# Altium PCB 7953_VHDC.PcbDoc
Units mil, origin at the board's own origin, x right, y up, seen from the top; angles counter-clockwise.
Board outline 2834.65 x 1417.32 mil, 2 copper layers (Top Layer, Bottom Layer); 2 components, 30 nets, 126 pads, 0 vias.
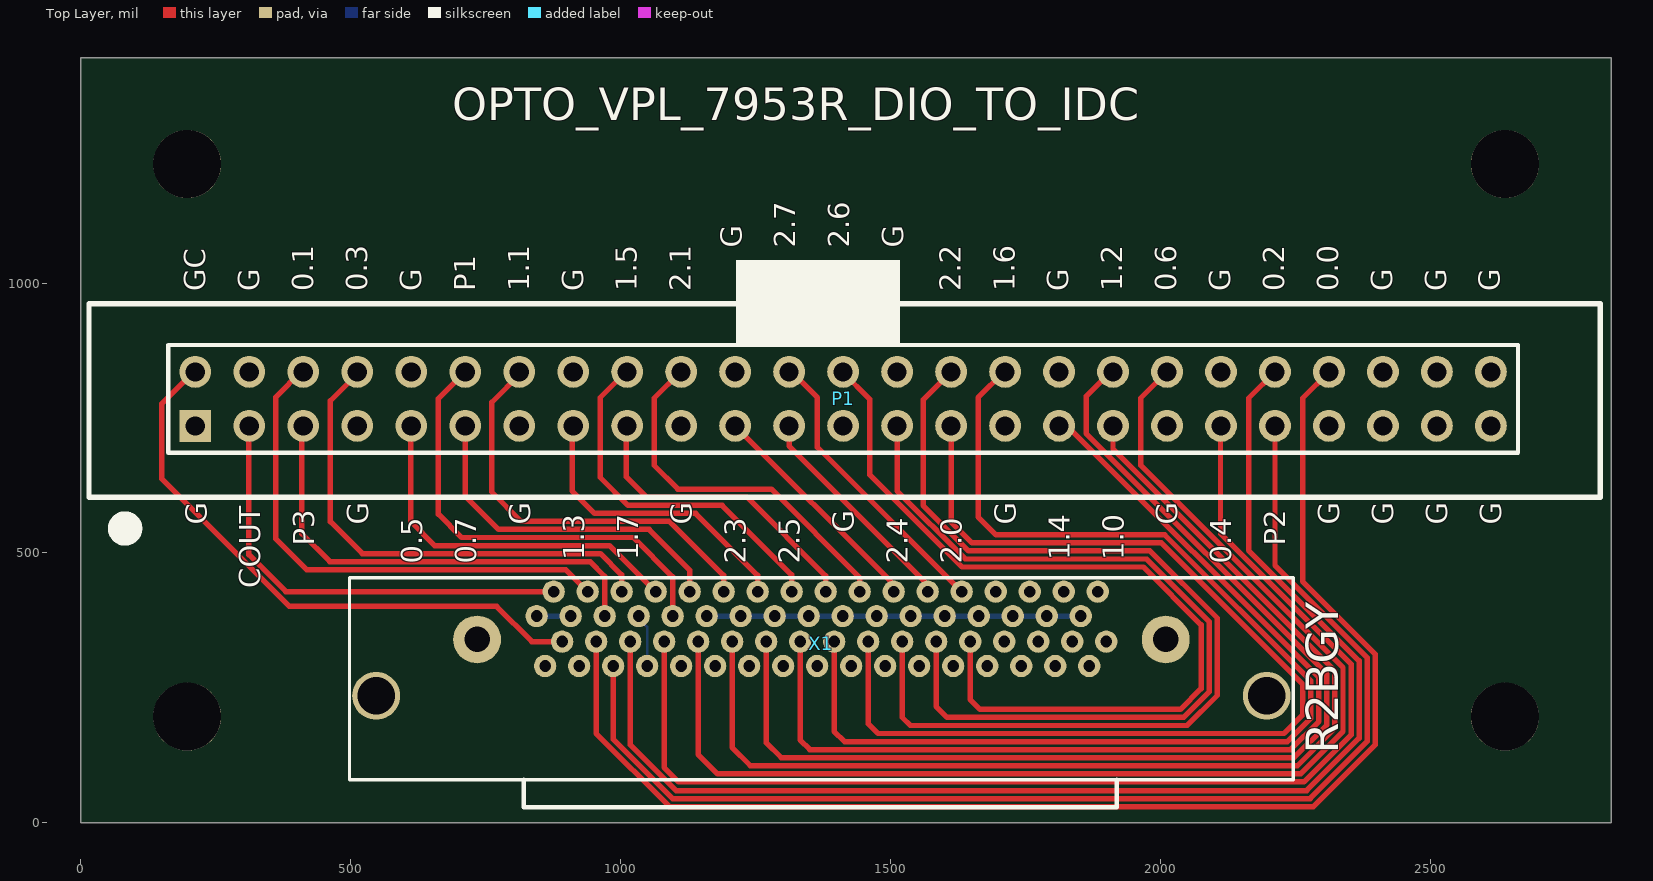
[diagram p0: Top Layer view]
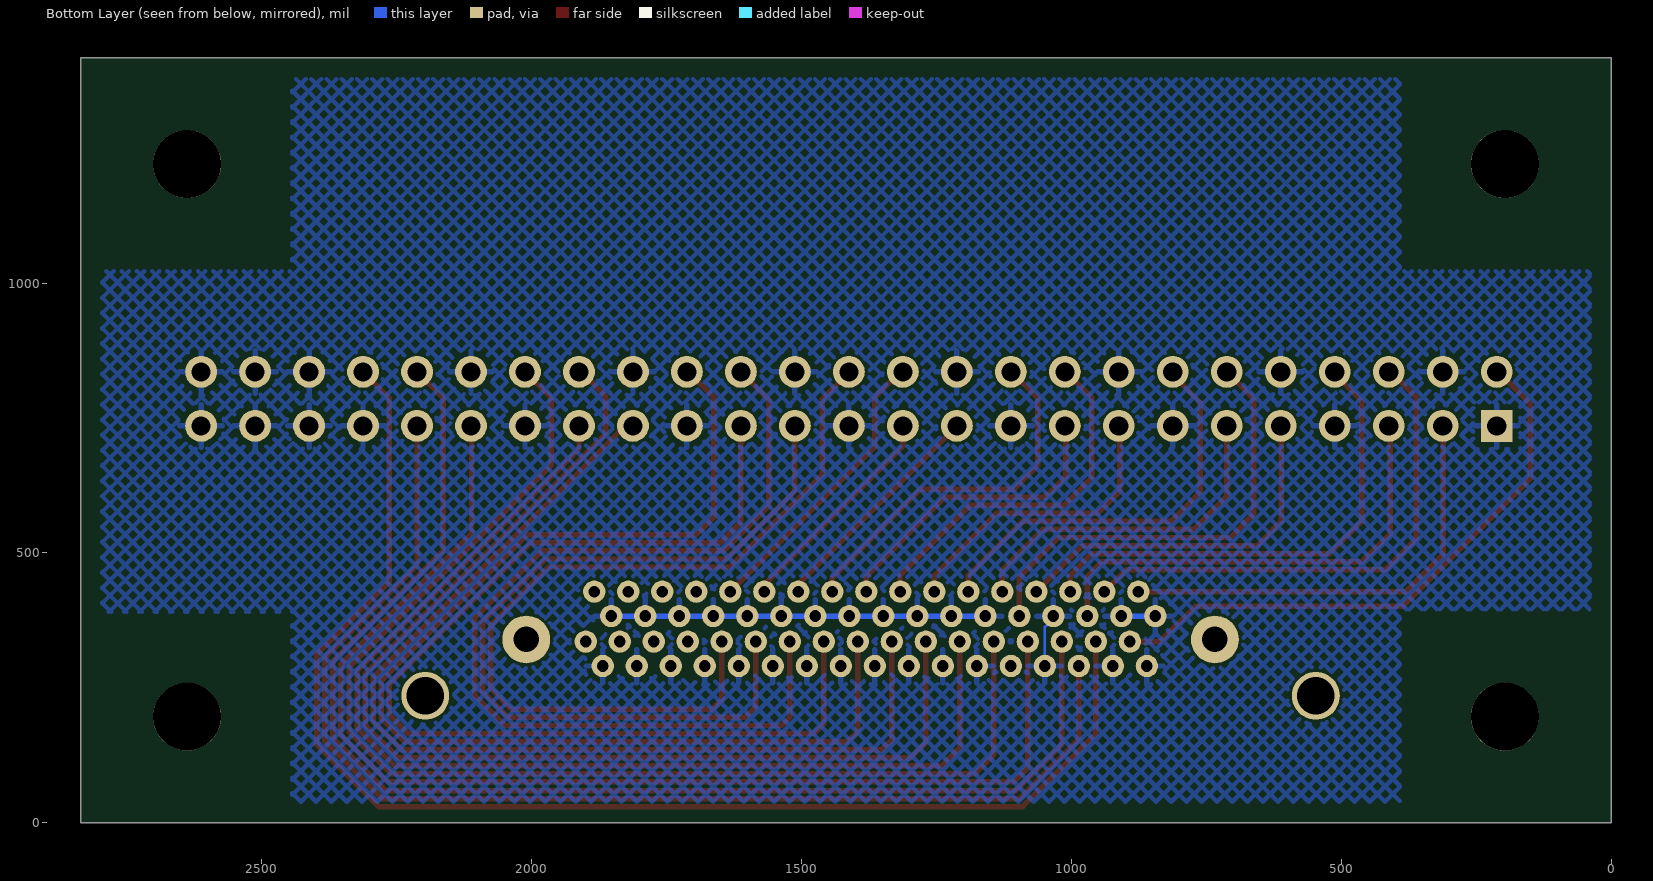
[diagram p1: Bottom Layer view, seen from below]

## Layer stack, top to bottom
Top Solder: solder mask 0.4, Solder Resist, Dk 3.5
Top Layer: signal copper 1.4
Dielectric 1: dielectric 12.6, FR-4, Dk 4.8
Bottom Layer: signal copper 1.4
Bottom Solder: solder mask 0.4, Solder Resist, Dk 3.5

## Board outline
0,0 0,1417.32 2834.65,1417.32 2834.65,0

## Design rules (kind name [scope] priority, off if disabled: settings)
Clearance [All] p1: gap=4.92 ignorepadtopadclearanceinfootprint=FALSE
PolygonConnect [All] p1: connectstyle=Relief reliefconductorwidth=10 reliefentries=4 polygonreliefangle="90 Angle" airgapwidth=10
RoutingVias [All] p1: holewidth=28 width=50 viastyle="Through Hole" minholewidth=28 minwidth=50 maxholewidth=28 maxwidth=50
SolderMaskExpansion [All] p1: expansion=4 istentingtop=FALSE
Width [All] p1: maxlimit=10 minlimit=4.92 preferedwidth=10
30 further rules are at their usual default settings.

## Classes and differential pairs
component class 7953_VHDC: X1

## Components (designator, comment, footprint, x,y, rotation, side; value= is the part's Value field where it differs from the comment)
P1 "Header 25X2" HDR2X25 211.85,735.47 r0 top
X1 "FPGA_connector" FPGA 546.85,235.47 r0 top

## Footprints (in the part's own frame and the unit in brackets; to place one, negate y for a bottom-side part, rotate by r counter-clockwise, add the part's x,y. Pads: shape width x height; smd on the part's side, far side on the other; paste and mask are expansions set on the pad)
FPGA [mm] "FPGA Connector"
  round 1.05 hole 0.55: 1(33.95,4.9) 2(33.15,3.75) 3(32.35,4.9) 4(31.55,3.75) 5(30.75,4.9) 6(29.95,3.75) 7(29.15,4.9) 8(28.35,3.75) 9(27.55,4.9) 10(26.75,3.75) 11(25.95,4.9) 12(25.15,3.75) 13(24.35,4.9) 14(23.55,3.75) 15(22.75,4.9) 16(21.95,3.75) 17(21.15,4.9) 18(20.35,3.75) 19(19.55,4.9) 20(18.75,3.75) 21(17.95,4.9) 22(17.15,3.75) 23(16.35,4.9) 24(15.55,3.75) 25(14.75,4.9) 26(13.95,3.75) 27(13.15,4.9) 28(12.35,3.75) 29(11.55,4.9) 30(10.75,3.75) 31(9.95,4.9) 32(9.15,3.75) 33(8.35,4.9) 34(7.55,3.75) 35(34.35,2.55) 36(33.55,1.4) 37(32.75,2.55) 38(31.95,1.4) 39(31.15,2.55) 40(30.35,1.4) 41(29.55,2.55) 42(28.75,1.4) 43(27.95,2.55) 44(27.15,1.4) 45(26.35,2.55) 46(25.55,1.4) 47(24.75,2.55) 48(23.95,1.4) 49(23.15,2.55) 50(22.35,1.4) 51(21.55,2.55) 52(20.75,1.4) 53(19.95,2.55) 54(19.15,1.4) 55(18.35,2.55) 56(17.55,1.4) 57(16.75,2.55) 58(15.95,1.4) 59(15.15,2.55) 60(14.35,1.4) 61(13.55,2.55) 62(12.75,1.4) 63(11.95,2.55) 64(11.15,1.4) 65(10.35,2.55) 66(9.55,1.4) 67(8.75,2.55) 68(7.95,1.4)
  round 2.25 hole 1.2: 69(37.15,2.65) 71(4.75,2.65)
  round 2.25 hole 1.75: 70(41.9,0) 72(0,0)
  silkscreen extent -1.25,-5.25 43.15,5.55
HDR2X25 [mm] "Connector; Header; 25x2 Position"
  rect 1.5x1.5 hole 0.9: 1(0,0)
  round 1.5 hole 0.9: 2(0,2.54) 3(2.54,0) 4(2.54,2.54) 5(5.08,0) 6(5.08,2.54) 7(7.62,0) 8(7.62,2.54) 9(10.16,0) 10(10.16,2.54) 11(12.7,0) 12(12.7,2.54) 13(15.24,0) 14(15.24,2.54) 15(17.78,0) 16(17.78,2.54) 17(20.32,0) 18(20.32,2.54) 19(22.86,0) 20(22.86,2.54) 21(25.4,0) 22(25.4,2.54) 23(27.94,0) 24(27.94,2.54) 25(30.48,0) 26(30.48,2.54) 27(33.02,0) 28(33.02,2.54) 29(35.56,0) 30(35.56,2.54) 31(38.1,0) 32(38.1,2.54) 33(40.64,0) 34(40.64,2.54) 35(43.18,0) 36(43.18,2.54) 37(45.72,0) 38(45.72,2.54) 39(48.26,0) 40(48.26,2.54) 41(50.8,0) 42(50.8,2.54) 43(53.34,0) 44(53.34,2.54) 45(55.88,0) 46(55.88,2.54) 47(58.42,0) 48(58.42,2.54) 49(60.96,0) 50(60.96,2.54)
  silkscreen extent -1.27,-1.27 62.23,3.81

## Part data
P1: "Header, 25-Pin, Dual row", LatestRevisionDate=17-Jul-2002, LatestRevisionNote="Re-released for DXP Platform.", Publisher="Altium Limited"
X1: library part FPGA_Connector

## Free pads (board coordinates)
  round 125.98 hole 125.98 unplated: 0(196.85,196.85) 0(196.85,1220.47) 0(2637.8,196.85) 0(2637.8,1220.47)

## Nets (pads, with @x,y where several pads share a name; then routed paths per layer and width w, separated by ;. In a path a pad name is that pad's centre, name@x,y a point inside that pad or via, vN(x,y) a via of type N, cw(c..) or ccw(c..) an arc to the next point about the centre after c; other vN are vias at no path point)
CLKOUT: P1.3 X1.33 | length 831.4
  Top Layer w10: P1.3@311,735.47 311,497.1 379.72,428.39 X1.33
GCLK0: P1.2 X1.67 | length 1091.2
  Top Layer w10: P1.2@210.16,837.16 150,777 150,637 386,401 770,401 835.13,335.87 X1.67
GND: P1.1 P1.4 P1.7 P1.10 P1.13 P1.16 P1.19 P1.22 P1.25 P1.28 P1.31 P1.34 P1.37 P1.40 P1.43 P1.45 P1.46 P1.47 P1.48 P1.49 P1.50 X1.2 X1.4 X1.6 X1.8 X1.10 X1.12 X1.14 X1.16 X1.18 X1.20 X1.22 X1.24 X1.28 X1.32 X1.34 X1.36 X1.38 X1.40 X1.42 X1.44 X1.46 X1.48 X1.50 X1.52 X1.54 X1.56 X1.58 X1.62 X1.66 X1.68 | length 854.9
  Bottom Layer w5: X1.28 1033.07,378.91 1048.82,363.16 X1.62
  Bottom Layer w10: X1.34 X1.32 ; X1.24 X1.22 X1.20 X1.18 X1.16 X1.14 X1.12 X1.10 X1.8 X1.6 X1.4 X1.2
P0.0: P1.44 X1.65 | length 2483.9
  Top Layer w10: X1.65 954.33,165.67 1090,30 2283,30 2397.53,144.53 2397.53,312.63 2263,447.15 2263,786.62 P1.44
P0.1: P1.6 X1.31 | length 949.8
  Top Layer w10: P1.6@409.66,837.66 361,789 361,526 418,469 897.97,469 X1.31
P0.2: P1.42 X1.63 | length 2400.4
  Top Layer w10: X1.63 1017.32,144.88 1102.36,59.84 2270.64,59.84 2367.69,156.89 2367.69,300.26 2163,504.95 2163,786.62 P1.42
P0.3: P1.8 X1.29 | length 908.5
  Top Layer w10: P1.8@513.66,833.66 462,782 462,558 521.16,498.84 962.16,498.84 1001.57,459.43 X1.29
P0.4: P1.39 X1.61 | length 2225.1
  Top Layer w10: X1.61 1080.32,102.99 1107.31,76 2265.69,76 2352.76,163.07 2352.76,294.08 2111,535.85 P1.39@2111,735.47
P0.5: P1.9 X1.27 | length 684.7
  Top Layer w10: P1.9@611,735.47 611,558 655.24,513.76 979.19,513.76 X1.27
P0.6: P1.38 X1.59 | length 2302.1
  Top Layer w10: X1.59 1143.31,126.69 1179.08,90.92 2259.51,90.92 2337.84,169.25 2337.84,287.9 1963,662.75 1963,786.62 P1.38@2018.48,842.11
P0.7: P1.11 X1.25 | length 642.7
  Top Layer w10: P1.11@712,735.47 712,605 773.39,543.61 1052.39,543.61 1127.56,468.44 X1.25
P1.0: P1.35 X1.57 | length 2085.9
  Top Layer w10: X1.57 1206.3,139.7 1240.16,105.84 2253.33,105.84 2322.92,175.43 2322.92,281.72 1911.85,692.79 P1.35
P1.1: P1.14 X1.23 | length 765.5
  Top Layer w10: P1.14@814.66,832.66 761,779 761,613 815.47,558.53 1090.47,558.53 1190.55,458.45 X1.23
P1.2: P1.36 X1.55 | length 2123.2
  Top Layer w10: X1.55 1269.29,148.71 1297.24,120.76 2247.15,120.76 2308,181.61 2308,275.54 1862,721.54 1862,790 P1.36@1909.66,837.66
P1.3: P1.15 X1.21 | length 558.9
  Top Layer w10: P1.15@910,735.47 910,615 951.55,573.45 1138.55,573.45 1253.54,458.46 X1.21
P1.4: P1.33 X1.53 | length 1927.9
  Top Layer w10: X1.53 1332.28,153.72 1350.31,135.69 2240.97,135.69 2293.08,187.79 2293.08,269.36 1826.97,735.47 P1.33
P1.5: P1.18 X1.19 | length 677.2
  Top Layer w10: P1.18@1010.66,836.66 962,788 962,640 1013.63,588.37 1187.63,588.37 1316.54,459.46 X1.19
P1.6: P1.32 X1.51 | length 2175.9
  Top Layer w10: X1.51 1395.28,169.72 1414.39,150.61 2234.79,150.61 2278.16,193.97 2278.16,263.18 2007.65,533.69 1695.31,533.69 1662,567 1662,788 P1.32@1710.66,836.66
P1.7: P1.17 X1.17 | length 568.9
  Top Layer w10: P1.17@1010,735.47 1010,641.29 1048,603.29 1233.71,603.29 1379.53,457.47 X1.17
P2.0: P1.29 X1.49 | length 1989.6
  Top Layer w10: X1.49 1458.27,183.73 1476.47,165.53 2228.61,165.53 2263.24,200.15 2263.24,257 2001.47,518.76 1650.54,518.76 1612,557.31 P1.29@1612,735.47
P2.1: P1.20 X1.15 | length 687.1
  Top Layer w10: P1.20@1111.16,836.16 1062,787 1062,662 1105.79,618.21 1278.79,618.21 1442.52,454.48 X1.15
P2.2: P1.30 X1.47 | length 1796.4
  Top Layer w10: X1.47 1521.26,195.74 1536.55,180.45 2049,180.45 2104.92,236.37 2104.92,379.28 1980.36,503.84 1644.36,503.84 1560,588.2 1560,783.62 P1.30
P2.3: P1.21 X1.13 | length 428.7
  Top Layer w10: P1.21 1499.52,447.81 1499.52,434.38 X1.13
P2.4: P1.27 X1.45 | length 1583
  Top Layer w10: P1.27@1512,735.47 1512,615.1 1638.18,488.92 1974.18,488.92 2090,373.1 2090,242.55 2042.82,195.37 1604.63,195.37 1584.25,215.75 X1.45
P2.5: P1.23 X1.11 | length 413.4
  Top Layer w10: P1.23 1311.85,698.15 1562.51,447.49 1562.51,434.38 X1.11
P2.6: P1.26 X1.43 | length 1616.4
  Top Layer w10: P1.26@1411.19,834.81 1461,785 1461,645 1632,474 1968,474 2075.08,366.92 2075.08,248.73 2036.64,210.29 1665.71,210.29 1647.24,228.76 X1.43
P2.7: P1.24 X1.9 | length 540.9
  Top Layer w10: P1.24@1314.19,837.81 1364,788 1364,695.88 X1.9
PFI1: P1.12 X1.26 | length 839.2
  Top Layer w10: P1.12@711.66,835.66 662,786 662,572 705.31,528.69 1023.31,528.69 1096.06,455.94 X1.26
PFI2: P1.41 X1.64 | length 2277.1
  Top Layer w10: X1.64 985.83,155.28 1096.18,44.92 2276.82,44.92 2382.61,150.71 2382.61,306.44 2211.85,477.2 P1.41
PFI3: P1.5 X1.30 | length 867.1
  Top Layer w10: P1.5@409,735.47 409,536 461.08,483.92 943.08,483.92 970.08,456.92 X1.30
pads on no net: X1.1 X1.3 X1.5 X1.7 X1.35 X1.37 X1.39 X1.41 X1.60 X1.69 X1.70 X1.71 X1.72

## Polygon pours and split planes (outlines as drawn)
GND on Bottom Layer "Top Overlay-No Net" (hatched 45Degree grid 20 track 8, remove dead copper, pour order 0): 39.37,39.37 39.37,1377.95 2795.28,1377.95 2795.28,39.37

## Other copper
Bottom Layer:
  pour cut-out: -2.15,395.8 -2.15,2.09 391.55,2.09 391.55,395.8
  pour cut-out: 2442.85,390.8 2442.85,-2.91 2836.55,-2.91 2836.55,390.8
  pour cut-out: 2442.85,1415.8 2442.85,1022.09 2836.55,1022.09 2836.55,1415.8
  pour cut-out: -2.15,1415.8 -2.15,1022.09 391.55,1022.09 391.55,1415.8

## Silkscreen, mask and mechanical layers (free items; w line width, h text height)
Top Overlay:
  circle w33.62: c81.85,545.47 r15
  rectangle: 1213.2,963.69 1517.13,1042.79
  rectangle: 1213.2,884.69 1517.13,963.79
  lines w10: 14.91,603.5 2814.13,603.5 2814.13,961.77 14.91,961.77 14.91,603.5
  text "OPTO_VPL_7953R_DIO_TO_IDC" at 687.56,1301.48 h60
  text "G" at 1223.71,1065.12 h39.37 r90
  text "2.7" at 1323.63,1065.12 h39.37 r90
  text "2.6" at 1423.54,1065.12 h39.37 r90
  text "G" at 1523.46,1065.12 h39.37 r90
  text "GC" at 230.68,985.12 h39.37 r90
  text "G" at 330.6,985.12 h39.37 r90
  text "0.1" at 430.51,985.12 h39.37 r90
  text "0.3" at 530.43,985.12 h39.37 r90
  text "G" at 630.34,985.12 h39.37 r90
  text "P1" at 730.26,985.12 h39.37 r90
  text "1.1" at 830.18,985.12 h39.37 r90
  text "G" at 930.09,985.12 h39.37 r90
  text "1.5" at 1030.01,985.12 h39.37 r90
  text "2.1" at 1129.93,985.12 h39.37 r90
  text "2.2" at 1629.51,985.12 h39.37 r90
  text "1.6" at 1729.43,985.12 h39.37 r90
  text "G" at 1829.34,985.12 h39.37 r90
  text "1.2" at 1929.26,985.12 h39.37 r90
  text "0.6" at 2029.18,985.12 h39.37 r90
  text "G" at 2129.09,985.12 h39.37 r90
  text "0.2" at 2229.01,985.12 h39.37 r90
  text "0.0" at 2328.93,985.12 h39.37 r90
  text "G" at 2428.84,985.12 h39.37 r90
  text "G" at 2528.76,985.12 h39.37 r90
  text "G" at 2628.67,985.12 h39.37 r90
  text "G" at 232.68,552.39 h39.37 r90
  text "G" at 532.43,552.39 h39.37 r90
  text "G" at 832.18,552.39 h39.37 r90
  text "G" at 1131.93,552.39 h39.37 r90
  text "G" at 1731.43,552.39 h39.37 r90
  text "G" at 2031.18,552.39 h39.37 r90
  text "G" at 2330.93,552.39 h39.37 r90
  text "G" at 2430.84,552.39 h39.37 r90
  text "G" at 2530.76,552.39 h39.37 r90
  text "G" at 2630.68,552.39 h39.37 r90
  text "G" at 1431.68,537.88 h39.37 r90
  text "P3" at 432.51,513.04 h39.37 r90
  text "P2" at 2231.01,513.04 h39.37 r90
  text "1.3" at 932.09,486.8 h39.37 r90
  text "1.7" at 1032.01,486.8 h39.37 r90
  text "1.4" at 1831.34,486.8 h39.37 r90
  text "1.0" at 1931.26,486.8 h39.37 r90
  text "0.5" at 632.34,480.24 h39.37 r90
  text "0.7" at 732.26,480.24 h39.37 r90
  text "2.3" at 1231.84,480.24 h39.37 r90
  text "2.5" at 1331.76,480.24 h39.37 r90
  text "2.4" at 1531.59,480.24 h39.37 r90
  text "2.0" at 1631.51,480.24 h39.37 r90
  text "0.4" at 2131.09,480.24 h39.37 r90
  text "COUT" at 332.59,434.32 h39.37 r90
  text "R2BGY" at 2328.99,128.05 h60 r90
Mechanical 1:
  the board outline again, w10